# EAGLE board ProtoBlue (EAGLE 9.2.0)
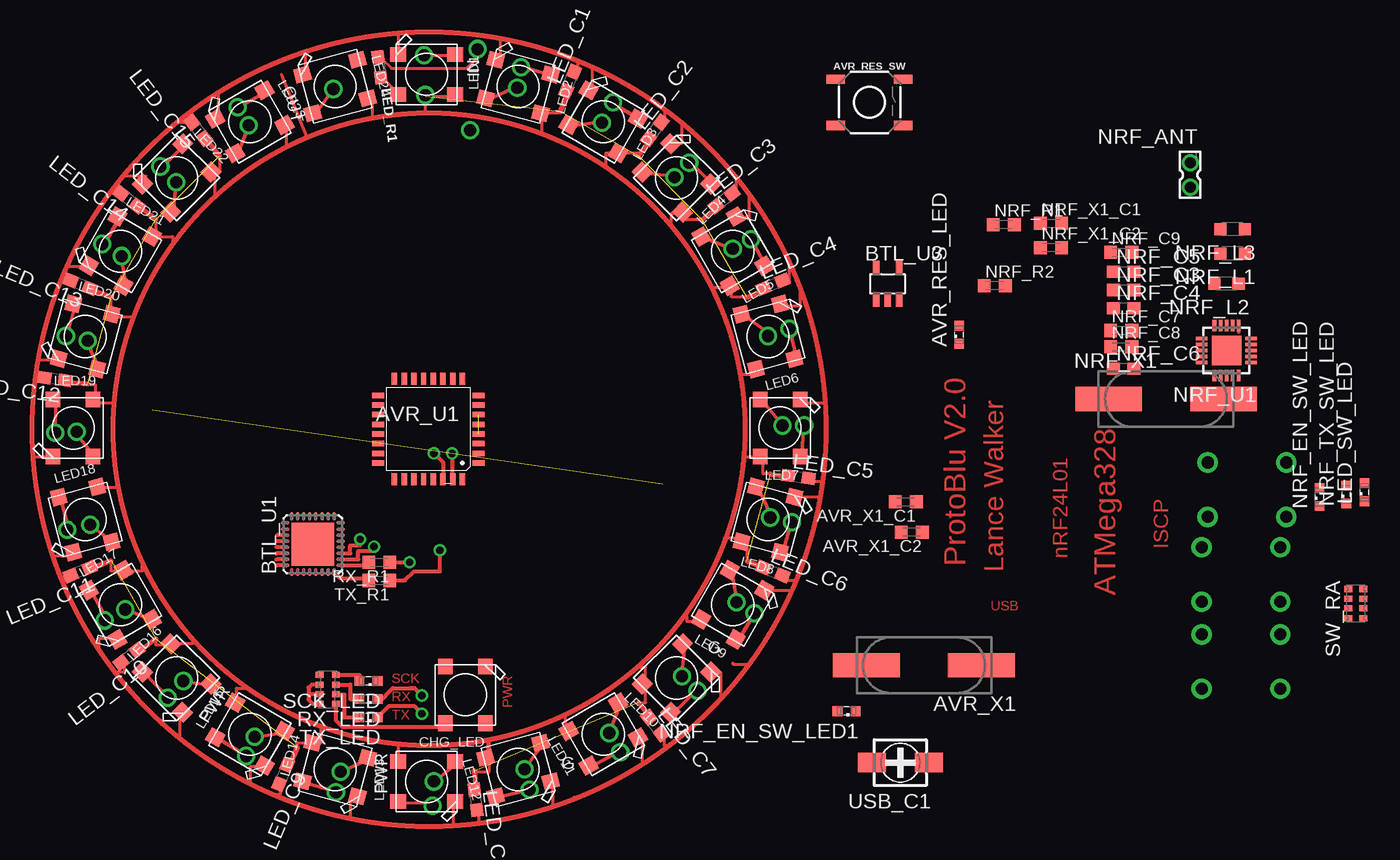
[diagram p0: board, top side]
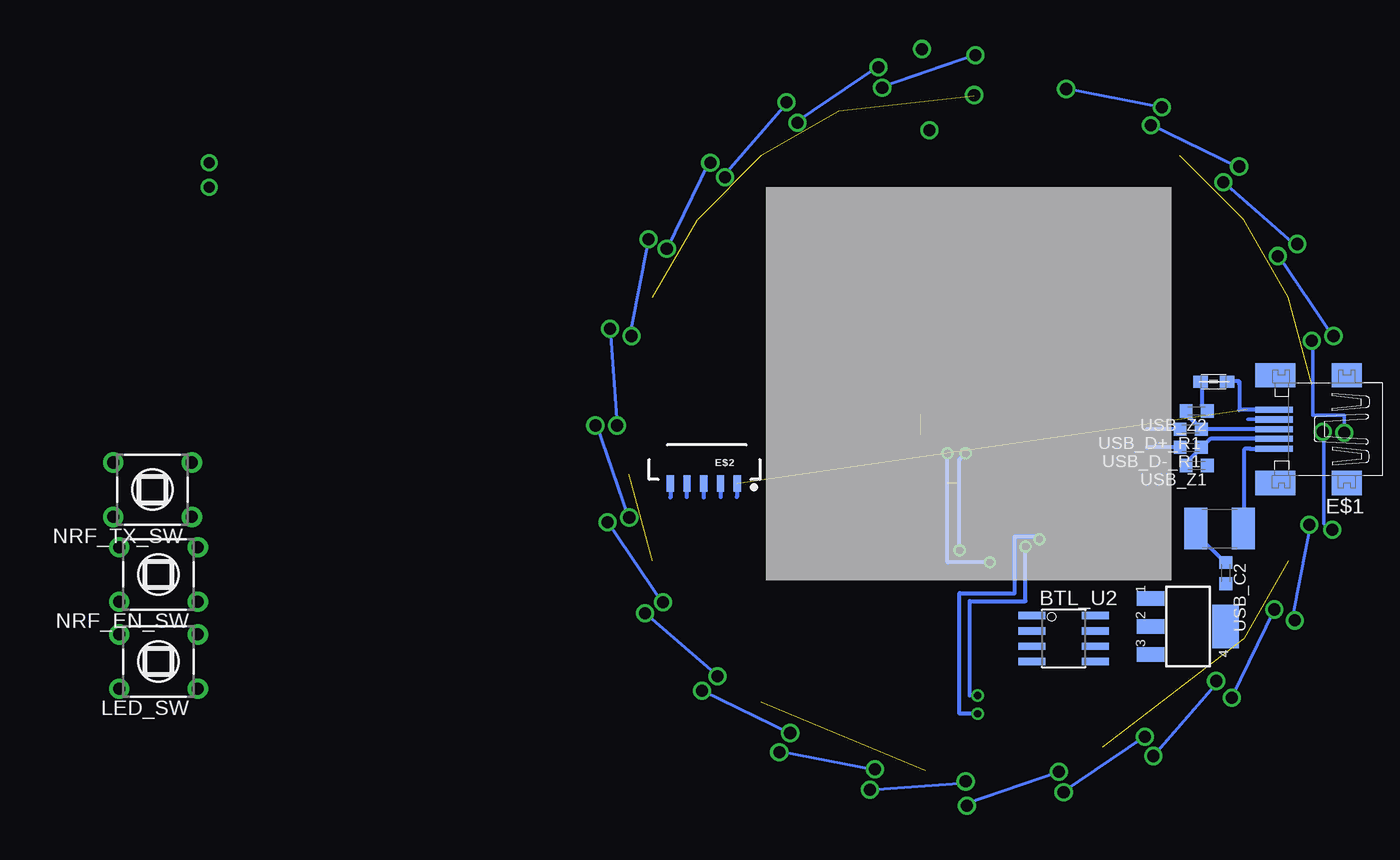
[diagram p1: board, bottom side, seen from below]

No outline drawn. Coordinates in mm, seen from the top.
Copper layers (1*16): Top 0.035mm / dielectric 1.5mm / Bottom 0.035mm
Design rules "default": minimum track width 6mil, minimum drill 0.35mm, track to track 6mil, track to pad 6mil, pad to pad 6mil, via to via 6mil, smd to smd 6mil, copper to edge 40mil, drill to drill 6mil, minimum pad ring 10mil, minimum via ring 8mil, stop-mask expansion 4mil, vias tented up to drill 0mil, thermal gap 10mil

## Footprints (pad centres in the part's own frame; a part is rotated, then mirrored left to right if it is on the bottom)
LED_SML0603 = smd 0.8 x 0.8: A 0.75,0; C -0.75,0
TACTILE_SWITCH_SMD_5.2MM = smd 1.524 x 0.762: 1 -2.794,1.905; 2 2.794,1.905; 3 -2.794,-1.905; 4 2.794,-1.905
VQFP32 = smd 1 x 0.45: 1 -4.15,2.8; 2 -4.15,2; 3 -4.15,1.2; 4 -4.15,0.4; 5 -4.15,-0.4; 6 -4.15,-1.2; 7 -4.15,-2; 8 -4.15,-2.8; 17 4.15,-2.8; 18 4.15,-2; 19 4.15,-1.2; 20 4.15,-0.4; 21 4.15,0.4; 22 4.15,1.2; 23 4.15,2; 24 4.15,2.8 | smd 0.45 x 1: 9 -2.8,-4.15; 10 -2,-4.15; 11 -1.2,-4.15; 12 -0.4,-4.15; 13 0.4,-4.15; 14 1.2,-4.15; 15 2,-4.15; 16 2.8,-4.15; 25 2.8,4.15; 26 2,4.15; 27 1.2,4.15; 28 0.4,4.15; 29 -0.4,4.15; 30 -1.2,4.15; 31 -2,4.15; 32 -2.8,4.15
CSM-7X-DU = smd 5.5 x 2: 1 -4.75,0; 2 4.75,0
C0603K = smd 1.05 x 1.08: 1 -0.875,0; 2 0.875,0
QFN32 = smd 0.7 x 0.3: 1 -2.3,1.75; 2 -2.3,1.25; 3 -2.3,0.75; 4 -2.3,0.25; 5 -2.3,-0.25; 6 -2.3,-0.75; 7 -2.3,-1.25; 8 -2.3,-1.75; 17 2.3,-1.75; 18 2.3,-1.25; 19 2.3,-0.75; 20 2.3,-0.25; 21 2.3,0.25; 22 2.3,0.75; 23 2.3,1.25; 24 2.3,1.75 | smd 0.3 x 0.7: 9 -1.75,-2.3; 10 -1.25,-2.3; 11 -0.75,-2.3; 12 -0.25,-2.3; 13 0.25,-2.3; 14 0.75,-2.3; 15 1.25,-2.3; 16 1.75,-2.3; 25 1.75,2.3; 26 1.25,2.3; 27 0.75,2.3; 28 0.25,2.3; 29 -0.25,2.3; 30 -0.75,2.3; 31 -1.25,2.3; 32 -1.75,2.3 | smd 3.53 x 3.53: EXP 0,0
SO08 = smd 0.61 x 2.21: 1 -1.905,-2.616; 2 -0.635,-2.616; 3 0.635,-2.616; 4 1.905,-2.616; 5 1.905,2.616; 6 0.635,2.616; 7 -0.635,2.616; 8 -1.905,2.616
SOT23-DBV = smd 0.55 x 1.2: 1 -0.95,-1.3; 2 0,-1.3; 3 0.95,-1.3; 4 0.95,1.3; 5 -0.95,1.3
WS2812B-NARROW = smd 1.3 x 1.2: 1-VDD 2.35,-1.65; 2-DOUT 2.35,1.65; 3-GND -2.35,1.65; 4-DIN -2.35,-1.65
32005-400 = smd 3.1 x 0.5: 1 3,1.6; 2 3,0.8; 3 3,0; 4 3,-0.8; 5 3,-1.6 | smd 2.5 x 2: M1 -3,-4.45; M2 -3,4.45 | smd 3.3 x 2: M3 2.9,4.45; M4 2.9,-4.45
1X05_1MM_RA = smd 0.6 x 1.35: 1 -1.619,0; 2 -0.238,0; 3 1.143,0; 4 2.524,0; 5 3.905,0
L1812 = smd 1.9 x 3.4: 1 -1.95,0; 2 1.95,0
SOT223 = smd 1.219 x 2.235: 1 -2.311,-3.099; 2 0,-3.099; 3 2.311,-3.099 | smd 3.6 x 2.2: 4 0,3.099
0805 = smd 1.2 x 1: 1 -1.1,0; 2 1.1,0
C0603 = smd 1.1 x 1: 1 -0.85,0; 2 0.85,0
0603-NO = smd 1.1 x 1: 1 -0.85,0; 2 0.85,0
TL1105T = drill 1 pad 1.676: 1 -2.25,3.25; 2 2.25,3.25; 3 -2.25,-3.25; 4 2.25,-3.25
332-02 = drill 0.9 pad 1.27: 1 0,-1; 2 0,1
L2012C = smd 1 x 1: 1 -1,0; 2 1,0
QFN20 = smd 0.95 x 0.3: 1 -2.05,1; 2 -2.05,0.5; 3 -2.05,0; 4 -2.05,-0.5; 5 -2.05,-1; 11 2.05,-1; 12 2.05,-0.5; 13 2.05,0; 14 2.05,0.5; 15 2.05,1 | smd 0.3 x 0.95: 6 -1,-2.05; 7 -0.5,-2.05; 8 0,-2.05; 9 0.5,-2.05; 10 1,-2.05; 16 1,2.05; 17 0.5,2.05; 18 0,2.05; 19 -0.5,2.05; 20 -1,2.05 | smd 2.45 x 2.45: EXP 0,0
CAY16 = smd 0.5 x 0.65: 1 -1.2,-0.675; 2 -0.4,-0.675; 3 0.4,-0.675; 4 1.2,-0.675; 5 1.2,0.675; 6 0.4,0.675; 7 -0.4,0.675; 8 -1.2,0.675
0603-ARC = smd 0.5 x 0.65: 1 -1.2,-0.625; 2 -0.4,-0.625; 3 0.4,-0.625; 4 1.2,-0.625; 5 1.2,0.625; 6 0.4,0.625; 7 -0.4,0.625; 8 -1.2,0.625
3018_11 = smd 2.3 x 1.6: + -2.35,0; - 2.35,0

## Placement (x,y rotation side)
AVR_RES_LED  [LED_SML0603]  77.9,43.3 90 top
AVR_RES_SW  [TACTILE_SWITCH_SMD_5.2MM]  70.5,62.5 0 top
AVR_U1  328AU  [VQFP32]  34.05,35.5 180 top
AVR_X1  16MHz  [CSM-7X-DU]  75,16 180 top
AVR_X1_C1  22pF  [C0603K]  73.5,29.5 180 top
AVR_X1_C2  22pF  [C0603K]  74,27 180 top
BTL_U1  ATMEGA8U2-MU  [QFN32]  24.5,26 90 top
BTL_U2  [SO08]  26.4,18.2 270 bottom
BTL_U3  LP2985-33DBVR  [SOT23-DBV]  72,47.5 0 top
CHG_LED  WS2812B5050  [WS2812B-NARROW]  37.1,13.55 270 top
E$1  USB  [32005-400]  6,35.5 180 bottom
E$2  BATT_IN  [1X05_1MM_RA]  55,31 180 bottom
F1  500mA  [L1812]  13.51,27.3 0 bottom
IC1  MC33269ST-5.0T3  [SOT223]  16.12,19.2 270 bottom
L1  BLM21  [0805]  14,39.43 180 bottom
LED1  WS2812B5050  [WS2812B-NARROW]  33.9,64.81 0 top
LED2  WS2812B5050  [WS2812B-NARROW]  41.46,63.81 345 top
LED3  WS2812B5050  [WS2812B-NARROW]  48.51,60.9 330 top
LED4  WS2812B5050  [WS2812B-NARROW]  54.55,56.25 315 top
LED5  WS2812B5050  [WS2812B-NARROW]  59.2,50.2 300 top
LED6  WS2812B5050  [WS2812B-NARROW]  62.11,43.16 285 top
LED7  WS2812B5050  [WS2812B-NARROW]  63.11,35.6 270 top
LED8  WS2812B5050  [WS2812B-NARROW]  62.11,28.04 255 top
LED9  WS2812B5050  [WS2812B-NARROW]  59.2,21 240 top
LED10  WS2812B5050  [WS2812B-NARROW]  54.55,14.95 225 top
LED11  WS2812B5050  [WS2812B-NARROW]  48.51,10.3 210 top
LED12  WS2812B5050  [WS2812B-NARROW]  41.46,7.39 195 top
LED13  WS2812B5050  [WS2812B-NARROW]  33.9,6.39 180 top
LED14  WS2812B5050  [WS2812B-NARROW]  26.34,7.39 165 top
LED15  WS2812B5050  [WS2812B-NARROW]  19.3,10.3 150 top
LED16  WS2812B5050  [WS2812B-NARROW]  13.25,14.95 135 top
LED17  WS2812B5050  [WS2812B-NARROW]  8.6,21 120 top
LED18  WS2812B5050  [WS2812B-NARROW]  5.69,28.04 105 top
LED19  WS2812B5050  [WS2812B-NARROW]  4.69,35.6 90 top
LED20  WS2812B5050  [WS2812B-NARROW]  5.69,43.16 75 top
LED21  WS2812B5050  [WS2812B-NARROW]  8.6,50.2 60 top
LED22  WS2812B5050  [WS2812B-NARROW]  13.25,56.25 45 top
LED23  WS2812B5050  [WS2812B-NARROW]  19.3,60.9 30 top
LED24  WS2812B5050  [WS2812B-NARROW]  26.34,63.81 15 top
LED_C1  100nF  [C0603]  45.76,64.23 67.5 top
LED_C2  100nF  [C0603]  52.76,60.18 52.5 top
LED_C3  100nF  [C0603]  58.48,54.46 37.5 top
LED_C4  100nF  [C0603]  62.53,47.46 22.5 top
LED_C5  100nF  [C0603]  64.62,31.56 352.5 top
LED_C6  100nF  [C0603]  62.53,23.74 337.5 top
LED_C7  100nF  [C0603]  52.76,11.02 307.5 top
LED_C8  100nF  [C0603]  37.94,4.88 277.5 top
LED_C9  100nF  [C0603]  22.04,6.97 247.5 top
LED_C10  100nF  [C0603]  9.32,16.74 217.5 top
LED_C11  100nF  [C0603]  5.27,23.74 202.5 top
LED_C12  100nF  [C0603]  3.18,39.64 172.5 top
LED_C13  100nF  [C0603]  5.27,47.46 157.5 top
LED_C14  100nF  [C0603]  9.32,54.46 142.5 top
LED_C15  100nF  [C0603]  15.04,60.18 127.5 top
LED_R1  [0603-NO]  30,65.4 277.5 top
LED_SW  [TL1105T]  101.2,16.3 90 bottom
LED_SW_LED  [LED_SML0603]  111.4,30.3 90 top
NRF_ANT  [332-02]  97,56.5 180 top
NRF_C3  2.2nF  [C0603]  91.5,47 0 top
NRF_C4  4.7pF  [C0603]  91.5,45.5 0 top
NRF_C5  1.5pF  [C0603]  91.5,48.5 0 top
NRF_C6  1pF  [C0603]  91.5,40.5 0 top
NRF_C7  33nF  [C0603K]  91.3,43.65 0 top
NRF_C8  1nF  [C0603K]  91.3,42.3 0 top
NRF_C9  10nF  [C0603K]  91.3,50.1 0 top
NRF_EN_SW  [TL1105T]  101.2,23.5 90 bottom
NRF_EN_SW_LED  [LED_SML0603]  107.7,29.9 90 top
NRF_EN_SW_LED1  [LED_SML0603]  68.6,12.2 180 top
NRF_L1  8.2nH  [L2012C]  100.5,50 180 top
NRF_L2  3.9nH  [L2012C]  100,47.5 180 top
NRF_L3  2.7nH  [L2012C]  100.5,52 180 top
NRF_R1  1M  [C0603K]  81.6,52.4 0 top
NRF_R2  22K  [C0603K]  80.85,47.35 0 top
NRF_TX_SW  [TL1105T]  101.7,30.5 90 bottom
NRF_TX_SW_LED  [LED_SML0603]  109.9,30.1 90 top
NRF_U1  nRF24L01  [QFN20]  100,42 180 top
NRF_X1  16MHz  [CSM-7X-DU]  95,38 0 top
NRF_X1_C1  22pF  [C0603K]  85.5,52.5 0 top
NRF_X1_C2  22pF  [C0603K]  85.5,50.5 0 top
RN2  1K  [CAY16]  25.73,14 270 top
RX_LED  [LED_SML0603]  29.1,13.2 180 top
RX_R1  1K  [C0603K]  30,24.5 180 top
SCK_LED  [LED_SML0603]  29.1,14.7 180 top
SW_RA  1K  [0603-ARC]  110.69,21.1 270 top
TX_LED  [LED_SML0603]  29.1,11.7 180 top
TX_R1  1K  [C0603K]  30,23 180 top
USB_C1  47uF  [3018_11]  73.05,7.95 180 top
USB_C2  100nF  [C0603K]  13,23.6 270 bottom
USB_D+_R1  22R  [C0603K]  15.9,35.5 180 bottom
USB_D-_R1  22R  [C0603K]  15.9,34 180 bottom
USB_Z1  PGB1010604  [C0603K]  15.4,32.5 180 bottom
USB_Z2  PGB1010604  [C0603K]  15.4,37 180 bottom

## Library data of the parts
AVR_RES_LED LED_SW_LED NRF_C3-NRF_C6 NRF_EN_SW_LED NRF_EN_SW_LED1 NRF_L1-NRF_L3 NRF_TX_SW_LED RX_LED SCK_LED TX_LED = eagle-ltspice
AVR_RES_SW = SparkFun-Switches
AVR_U1 = atmel
AVR_X1 NRF_X1 = crystal
AVR_X1_C1 AVR_X1_C2 NRF_C7-NRF_C9 NRF_R1 NRF_R2 NRF_X1_C1 NRF_X1_C2 RX_R1 TX_R1 USB_C2 USB_D+_R1 USB_D-_R1 USB_Z1 USB_Z2 = ref-packages-longpad
BTL_U1 = cypress
BTL_U2 = burr-brown
BTL_U3 = texas
CHG_LED LED1-LED24 LED_R1 = microbuilder
E$1 = con-cypressindustries
E$2 = SparkFun-Connectors
F1 LED_C1-LED_C15 = rcl
IC1 = linear
L1 = wuerth-elektronik
LED_SW NRF_EN_SW NRF_TX_SW = switch
NRF_ANT = con-garry
NRF_U1 = allegro
RN2 SW_RA = resistor-dil
USB_C1 = c-trimm

## Nets
GND: E$1.5
N$26: LED_R1.1
RXD: AVR_U1.30
RXD1: BTL_U1.8
S$10: SCK_LED.A
S$12: LED_R1.2
S$13: NRF_U1.6
S$14: AVR_U1.4 AVR_U1.6
S$34: LED2.3-GND
S$86: RX_LED.A
S$91: BTL_U1.10
S$98: BTL_U1.11 TX_LED.C
S$105: NRF_U1.14
TXD1: BTL_U1.9
USB_D+: E$1.3
USB_D-: E$1.2
USB_ID: E$1.4
VCC: E$1.1

## Tracks (layer width: path | path; a pad name or v marks a point on that pad's centre or on a via)
+5V
  Top 0.35: 22.3,24.25 21.5,24.25
BATT_GND1
  Bottom 0.35: 58.9,31 58.9,29.85
BATT_GND2
  Bottom 0.35: 57.55,31 57.55,29.9
BATT_TEMP_SENSE
  Bottom 0.35: 56.15,31 56.15,29.85
BATT_VIN
  Bottom 0.35: 54.75,31 54.75,29.9
GND  (1 unrouted)
  Bottom 0.305: E$1.5 10.35,37.1 11.25,37.1
  Bottom 0.35: 53.4,31 53.4,29.9 | 10.35,37.1 11.9,37.1 11.9,39.25 | 11.9,39.45 11.9,39.25 | 11.9,39.25 11.9,39.45 | 11.9,39.45 12.9,39.45
N$1  (via drill 0.5)
  Top 0.305: 38.96,62.73 v41.35,63.8 | 36.45,66.36 v33.76,66.41
  Bottom 0.254: v33.76,66.41 v41.35,63.8
N$2  (via drill 0.5)
  Top 0.305: 44.36,64.7 v41.77,65.44 | 45.84,60.54 v48.43,60.95
  Bottom 0.254: v41.77,65.44 v48.43,60.95
N$3  (via drill 0.5)
  Top 0.305: 51.56,61.05 v49.26,62.44 | 51.93,56.65 v54.53,56.38
  Bottom 0.254: v49.26,62.44 v54.53,56.38
N$4  (via drill 0.5)
  Top 0.305: 57.58,55.66 v55.72,57.59 | 56.79,51.31 v59.24,50.38
  Bottom 0.254: v55.72,57.59 v59.24,50.38
N$5  (via drill 0.5)
  Top 0.305: v60.7,51.25 62,48.9 | 60.11,44.9 v62.23,43.37
  Bottom 0.254: v60.7,51.25 v62.23,43.37
N$6  (via drill 0.5)
  Top 0.305: v63.87,43.83 64.52,41.22 | 61.66,37.85 v63.31,35.82
  Bottom 0.254: v63.87,43.83 v63.31,35.82
N$7  (via drill 0.5)
  Top 0.305: 64.96,33.15 v65.01,35.84 | 61.33,30.64 v62.4,28.25
  Bottom 0.254: v65.01,35.84 v62.4,28.25
N$8  (via drill 0.5)
  Top 0.305: 63.3,25.24 v64.04,27.83 | 59.14,23.75 v59.55,21.17
  Bottom 0.254: v64.04,27.83 v59.55,21.17
N$9  (via drill 0.5)
  Top 0.305: 59.65,18.04 v61.04,20.34 | 55.25,17.67 v54.98,15.07
  Bottom 0.254: v61.04,20.34 v54.98,15.07
N$10  (via drill 0.5)
  Top 0.305: 54.26,12.02 v56.19,13.88 | 49.91,12.81 v48.98,10.36
  Bottom 0.254: v56.19,13.88 v48.98,10.36
N$11  (via drill 0.5)
  Top 0.305: 47.49,7.6 v49.85,8.9 | v41.97,7.37 43.5,9.49
  Bottom 0.254: v49.85,8.9 v41.97,7.37
N$12  (via drill 0.5)
  Top 0.305: v34.42,6.29 36.45,7.94 | 39.82,5.08 v42.42,5.73
  Bottom 0.254: v42.42,5.73 v34.42,6.29
N$13  (via drill 0.5)
  Top 0.305: 31.75,4.64 v34.44,4.59 | v26.85,7.2 29.24,8.27
  Bottom 0.254: v34.44,4.59 v26.85,7.2
N$14  (via drill 0.5)
  Top 0.305: 23.84,6.3 v26.43,5.56 | v19.77,10.05 22.36,10.46
  Bottom 0.254: v26.43,5.56 v19.77,10.05
N$15  (via drill 0.5)
  Top 0.305: 16.64,9.95 v18.94,8.56 | v13.67,14.62 16.27,14.35
  Bottom 0.254: v18.94,8.56 v13.67,14.62
N$16  (via drill 0.5)
  Top 0.305: 10.62,15.34 v12.48,13.41 | 11.41,19.68 v8.96,20.62
  Bottom 0.254: v12.48,13.41 v8.96,20.62
N$17  (via drill 0.5)
  Top 0.305: 6.2,22.11 v7.5,19.75 | 8.09,26.1 v5.97,27.63
  Bottom 0.254: v7.5,19.75 v5.97,27.63
N$18  (via drill 0.5)
  Top 0.305: v4.33,27.18 3.68,29.78
N$19  (via drill 0.5)
  Top 0.305: v3.19,35.16 3.24,37.85
N$20  (via drill 0.5)
  Top 0.254: v4.16,43.17 4.9,45.76
  Top 0.305: 9.06,47.24 v8.65,49.83
  Bottom 0.254: v4.16,43.17 v8.65,49.83
N$21  (via drill 0.5)
  Top 0.305: v7.16,50.66 8.55,52.97 | 12.95,53.33 v13.22,55.93
  Bottom 0.254: v7.16,50.66 v13.22,55.93
N$22  (via drill 0.5)
  Top 0.305: 13.94,58.98 v12.01,57.12 | 18.29,58.19 v19.22,60.64
  Bottom 0.254: v12.01,57.12 v19.22,60.64
N$23  (via drill 0.5)
  Top 0.305: 24.7,61.51 v26.23,63.63 | v18.35,62.1 20.7,63.4
  Bottom 0.254: v18.35,62.1 v26.23,63.63
N$26
  Top 0.254: LED_R1.1 29.96,66.24
N$27
  Top 0.254: 30.09,66.14 30.16,66.14 31,65.3 37.2,65.3 38.1,66.2 38.1,66.68 38.24,66.82
N$28
  Top 0.254: 30.31,64.46 30.35,64.46 31.75,63.06
RD+
  Top 0.35: 22.3,25.75 21.5,25.75
RD-
  Top 0.35: 22.3,25.25 21.5,25.25
RXD  (via drill 0.6)
  Top 0.35: v34.5,33.5 35.25,32.75 AVR_U1.30 | 30.95,23 32.1,23 32.85,23.75 35,23.75 v35,25.5
  Bottom 0.35: v35,25.5 35,33 v34.5,33.5
RXD1
  Top 0.35: 29.05,23.2 26.75,23.2 BTL_U1.8
S$1
  Top 0.254: 31.6,66.6 31.6,68.2 31.5,68.2
S$2
  Top 0.254: 39.8,65.9 40,65.9 40,67.7
S$3
  Top 0.254: 46.4,65.2 46.4,65.9
S$4
  Top 0.254: 47.6,63.6 47.6,65.4
S$5
  Top 0.254: 53.6,60.9 53.6,61.9
S$6
  Top 0.254: 54.4,59.1 55,59.1 55,60.8
S$7
  Top 0.254: 59.5,54.9 59.5,56.2
S$8
  Top 0.254: 59.9,53 60.6,53 60.6,54.7
S$9
  Top 0.254: 63.6,47.7 63.9,47.7 63.9,49.1
S$10
  Top 0.35: 26.4,15.2 28.35,15.2 SCK_LED.A
S$11
  Top 0.35: 25.05,14.4 24.4,14.4 24.15,14.15 24.15,13.6 | 24.15,13.6 24.15,13.15 24.5,12.8 25.05,12.8 | 25.05,13.6 24.15,13.6
S$12
  Top 0.254: LED_R1.2 30.15,64.56
S$13
  Top 0.305: NRF_U1.6 101,43.5
S$14  (1 unrouted)
S$16
  Top 0.254: 63.4,45.7 64.8,45.7 64.8,46.8
S$17
  Top 0.254: 65.1,37.7 66.8,37.7
S$18
  Top 0.254: 65.7,31.3 65.7,31.2 66.6,31.2
S$19
  Top 0.254: 64.7,29.9 66.3,29.9 66.3,29.5
S$20
  Top 0.254: 63.7,23.3 63.7,23 64.5,23
S$21
  Top 0.254: 62.1,22.2 64,22.2 64,22
S$22
  Top 0.254: 59.2,16.2 59.2,16.1 60.5,16.1
S$23
  Top 0.254: 57.6,15.4 58.2,15.4 58.2,13.3
S$24
  Top 0.254: 53.5,10.2 53.5,9.4 53.9,9.4
S$25
  Top 0.254: 51.5,10 51.7,10 51.7,7.9
S$26
  Top 0.254: 46.1,5.1 46.4,5.1
S$27
  Top 0.254: 44.3,6.3 44.3,4.4
S$28
  Top 0.254: 38.2,4 38.2,3 38.3,3
S$29
  Top 0.254: 36.4,4.7 36.1,4.7 36.1,2.7
S$30
  Top 0.254: 28.3,5.1 27.6,5.1 27.6,3.4
S$31
  Top 0.254: 21.8,6.1 21.8,5.3 21.4,5.3
S$32
  Top 0.254: 20.5,7.6 19.3,7.6 19.3,6.3
S$33
  Top 0.254: 13.7,11.9 13.5,11.9 13.5,10.2
S$35
  Top 0.254: 8.9,16.1 8.9,15.4 8.2,15.4
S$36
  Top 0.254: 8.5,18.2 6.8,18.2 6.8,17.4
S$37
  Top 0.254: 4.6,23.3 3.9,23.3 3.9,22.9
S$38
  Top 0.254: 4.9,25.2 4.9,25 3.1,25
S$39
  Top 0.254: 3.2,33.2 1.4,33.2 1.4,33.4
S$40
  Top 0.254: 2.6,39.5 2.6,39.8 1.6,39.8
S$41
  Top 0.254: 3.8,41.2 1.9,41.2 1.9,41.8
S$42  (1 unrouted)
  Top 0.406: 52.45,11.59 51.88,12.33 51.42,12.93 | 38.03,5.62 37.91,6.54 37.81,7.29
S$43  (via drill 0.5)  (4 unrouted)
  Top 0.406: 61.94,47.03 61.09,46.68 60.38,46.39 | 58.01,53.85 57.27,53.28 56.67,52.82 | 52.45,59.41 51.88,58.67 51.42,58.07 | 45.63,63.34 45.28,62.49 44.99,61.78
  other vias: 33.8,63.01
S$44  (3 unrouted)
  Top 0.406: 4.22,39.43 5.14,39.31 5.89,39.21 | 6.26,47.03 7.11,46.68 7.82,46.39 | 15.75,59.41 16.32,58.67 16.78,58.07 | 10.19,53.85 10.93,53.28 11.53,52.82
S$45  (1 unrouted)
  Top 0.406: 63.98,31.57 63.06,31.69 62.3,31.79 | 61.94,23.97 61.09,24.32 60.38,24.61
S$46
  Top 0.254: 4.6,47.7 4.6,48 3.9,48
S$47
  Top 0.254: 6,48.9 4.2,48.9 4.2,48.8
S$48
  Top 0.254: 8.9,54.9 8.9,55.2 8,55.2
S$49
  Top 0.254: 10.7,55.5 10.7,56.4 8.9,56.4
S$50
  Top 0.254: 14.7,60.8 13.1,60.8 13.1,60.6
S$51
  Top 0.254: 16.7,61.4 16.7,63.3
S$52
  Top 0.254: 23.9,64.8 23.9,66.6 23.8,66.6
S$53
  Top 0.254: 33.6,61.6 33.8,61.6 33.8,63 36.7,63
S$54
  Top 0.254: 43.5,61.5 43.4,61.5 43.4,59.9
S$55
  Top 0.254: 45,61.8 45,61.6 43.4,61.6
S$56
  Top 0.254: 49.8,58.3 48.7,58.3 48.7,57.2
S$57
  Top 0.254: 51.4,58.1 51.4,58.3 49.9,58.3
S$58
  Top 0.254: 56.8,52.8 55.4,52.8 55.4,53.3 54.1,53.3 54.1,52.4
S$59
  Top 0.254: 60.3,46.4 59.1,46.4 59.1,47.2 57.6,47.2 57.6,46.8
S$60
  Top 0.254: 61,40.3 61,40 59.8,40
S$61
  Top 0.254: 61.7,33.2 60.1,33.2 60.1,33.1
S$62
  Top 0.254: 62.3,31.8 61.7,31.8 61.7,33.1
S$63
  Top 0.254: 58.5,26.5 60.1,26.5 60.1,26.3 60.4,26.3 60.4,24.5
S$64
  Top 0.254: 56.8,19.6 55.4,19.6 55.4,20.2
S$65
  Top 0.254: 52,14.5 52,14.6 | 52,14.6 52,15.8 51.2,15.8 | 51.4,12.9 52,12.9 52,14.6
S$66
  Top 0.254: 45.8,10.4 45.4,10.4 45.4,12
S$67
  Top 0.254: 39,8.3 39,9.9 39.1,9.9
S$68
  Top 0.254: 37.8,7.2 39.1,7.2 39.1,9.7
S$69
  Top 0.254: 31.6,7.9 31.6,9.5 31.5,9.5
S$70
  Top 0.254: 23.2,9.2 23.2,9.6 24.7,9.6 25.2,9.6 25.2,11
S$71
  Top 0.254: 18.2,12.9 18.2,14.1 19.2,14.1
S$72
  Top 0.254: 12.9,17.8 14.6,17.8 14.6,18.2
S$73
  Top 0.254: 11.5,18.2 11.5,17.7 13.2,17.7
S$74
  Top 0.254: 9.2,23.8 9.5,23.8 | 9.5,23.8 10.4,23.8 10.4,24.2 | 7.8,24.7 7.8,23.8 9.5,23.8
S$75
  Top 0.254: 6.9,30.7 8.4,30.7
S$76
  Top 0.254: 6.5,37.9 6.5,37.7 | 6.5,37.7 8.1,37.7 | 5.8,39.2 6.5,39.2 6.5,37.7
S$77
  Top 0.254: 7.8,46.5 7.8,44.8 8.2,44.8 9.7,44.8 9.7,44.9
S$78
  Top 0.254: 11.6,51.4 12.9,51.4 12.9,50.8
S$79
  Top 0.254: 11.5,52.8 11.5,51.3
S$80
  Top 0.254: 16.4,56.6 16.4,54.8
S$81
  Top 0.254: 16.8,58.2 16.8,56.7 16.2,56.7
S$82
  Top 0.254: 22.4,60.5 22.3,60.5 22.3,58.8
S$83
  Top 0.254: 29.4,62.7 29.4,61.2 29.3,61.2
S$84
  Top 0.254: 21.9,64.8 24,59.6
S$85  (1 unrouted)
S$86
  Top 0.35: 26.4,14.4 27.6,14.4 27.6,13.25 27.6,13.2 RX_LED.A
S$87
  Top 0.35: 26.4,13.6 27.1,13.6 27.1,11.95 27.1,11.7 28.3,11.7
S$88
  Top 0.35: 26.4,12.8 26.4,11.45 26.85,11 26.95,10.9 28.2,10.9 35.45,10.9 35.45,11.55
S$89
  Bottom 0.35: 15.5,27.3 15.5,26.9 13.05,24.45
S$90
  Bottom 0.35: 15,39.5 15,37.5 14.5,37
S$91  (via drill 0.6)
  Top 0.35: 30,13 31.1,14.1 32.6,14.1 | 32.6,14.1 32.85,14.1 | v33.5,13.5 32.9,14.1 32.6,14.1 | BTL_U1.10 28.25,24.75 28.25,25.45 29.55,25.45 v29.55,25.8
  Bottom 0.35: v33.5,13.5 34.15,13.5 34.15,21.3 29.55,21.3 v29.55,25.8
S$92  (via drill 0.5)
  Top 0.305: 6.87,40.36 v5.8,42.75
S$93  (via drill 0.5)
  Top 0.305: v4.89,35.18 6.54,33.15
S$94  (via drill 1)
  Bottom 0.305: 5.8,42.75 5.8,36.65 3.2,36.65 v3.2,35.2 3.2,35.15
S$95
  Bottom 0.305: 4.9,35.2 4.9,27.7 4.35,27.15
S$96
  Bottom 0.35: 17,35.5 19.5,35.5
S$98  (via drill 0.6)
  Top 0.35: TX_LED.C 30.8,12.65 32.85,12.65 v33.5,12 | BTL_U1.11 27.6,25.25 27.6,25.9 28.4,25.9 v28.4,26.4
  Bottom 0.35: v33.5,12 35,12 35,21.95 30.45,21.95 30.45,26.65 28.4,26.65 v28.4,26.4
S$99
  Bottom 0.35: 17,34 19.5,34
S$100  (via drill 1)
  other vias: 33.7,66.4
S$101  (via drill 1)
  other vias: 33.8,63.1
S$102  (via drill 1)
  other vias: 41.7,65.4
S$103  (via drill 1)
  other vias: 41.4,63.7
S$104  (via drill 1)
  other vias: 49.3,62.5
S$106  (via drill 1)
  other vias: 48.4,60.8
S$107  (via drill 1)
  other vias: 55.6,57.5
S$108  (via drill 1)
  other vias: 54.4,56.3
S$109  (via drill 1)
  other vias: 60.7,51.2
S$110  (via drill 1)
  other vias: 59.2,50.4
S$111  (via drill 1)
  other vias: 63.9,43.8
S$112  (via drill 1)
  other vias: 62.1,43.2
S$113  (via drill 1)
  other vias: 65.1,35.8
S$114  (via drill 1)
  other vias: 63.3,35.8
S$115  (via drill 1)
  other vias: 64.1,27.8
S$116  (via drill 1)
  other vias: 62.3,28.2
S$117  (via drill 1)
  other vias: 61,20.3
S$118  (via drill 1)
  other vias: 59.5,21.2
S$119  (via drill 1)
  other vias: 55,15.1
S$120  (via drill 1)
  other vias: 56.3,13.9
S$121  (via drill 1)
  other vias: 49,10.4
S$122  (via drill 1)
  other vias: 49.9,8.8
S$123  (via drill 1)
  other vias: 42,7.4
S$124  (via drill 1)
  other vias: 42.4,5.7
S$125  (via drill 1)
  other vias: 34.5,6.4
S$126  (via drill 1)
  other vias: 34.4,4.4
S$127  (via drill 1)
  other vias: 26.8,7.2
S$128  (via drill 1)
  other vias: 26.4,5.5
S$129  (via drill 1)
  other vias: 19.7,10.1
S$130  (via drill 1)
  other vias: 19,8.5
S$131  (via drill 1)
  other vias: 13.8,14.7
S$132  (via drill 1)
  other vias: 12.5,13.3
S$133  (via drill 1)
  other vias: 9,20.6
S$134  (via drill 1)
  other vias: 7.3,19.7
S$135  (via drill 1)
  other vias: 6.1,27.6
S$136  (via drill 1)
  other vias: 4.2,27.2
S$137  (via drill 1)
  other vias: 5,35.3
S$138  (via drill 1)
  other vias: 5.9,42.8
S$139  (via drill 1)
  other vias: 4.1,43.2
S$140  (via drill 1)
  other vias: 8.7,49.8
S$141  (via drill 1)
  other vias: 7.1,50.8
S$142  (via drill 1)
  other vias: 13.2,55.9
S$143  (via drill 1)
  other vias: 11.9,57.2
S$144  (via drill 1)
  other vias: 19.2,60.6
S$145  (via drill 1)
  other vias: 18.3,62.1
S$146  (via drill 1)
  other vias: 26.2,63.6
S$147  (via drill 1)
  other vias: 38.1,66.9
S$148  (via drill 1)
  other vias: 37.5,60.2
TXD  (via drill 0.6)
  Top 0.35: v36,33.5 36,31.35 | 31,24.5 v32.5,24.5
  Bottom 0.35: v32.5,24.5 36,24.5 v36,33.5
TXD1
  Top 0.35: BTL_U1.9 29.4,24.25
UGND
  Top 0.35: 22.25,26.25 21.55,26.25
USB_D+
  Bottom 0.305: E$1.3 10.25,35.5 11.15,35.5
  Bottom 0.35: 15,35.5 15.55,36.05 | 15.55,36.05 16.5,37 | 10.25,35.5 15,35.5 | 15,35.5 15.55,36.05
USB_D-
  Bottom 0.305: E$1.2 10.05,34.7 11.15,34.7
  Bottom 0.35: 15,34 15.45,33.55 | 15.45,33.55 16.5,32.5 | 10.05,34.7 14.3,34.7 15.45,33.55
USB_ID
  Bottom 0.305: E$1.4 11.2,36.3
USBVCC
  Top 0.35: 22.3,24.75 21.5,24.75
VCC
  Bottom 0.305: E$1.1 10.3,33.9 11,33.9 11.05,33.9 11.15,33.9
  Bottom 0.35: 11,33.9 11.05,33.9 | 11.05,33.9 11.4,33.9 11.5,33.8 11.5,27.2 | 11.05,33.9 10.3,33.9
VDD1  (2 unrouted)
  Top 0.406: 23.21,9.22 22.92,8.51 22.57,7.66 | 11.53,18.18 10.93,17.72 10.19,17.15 | 7.82,24.61 7.11,24.32 6.26,23.97
VUCAP
  Top 0.35: 22.25,26.75 21.55,26.75
(copper drawn outside any net)
  shapes: Top circle x2

## Text on the board
Top: ISCP | nRF24L01 | ProtoBlu V2.0 | Lance Walker | ATMega328 | USB | SCK | RX | TX | PWR
tPlace: IN | OUT | G | PWR | G | PWR